# Altium PCB PCB1.PcbDoc
Units mm, origin at the board's own origin, x right, y up, seen from the top; angles counter-clockwise.
Board outline 62 x 50 mm, 2 copper layers (Top Layer, Bottom Layer), stack 1.571 mm thick; 44 components, 32 nets, 185 pads, 33 vias.
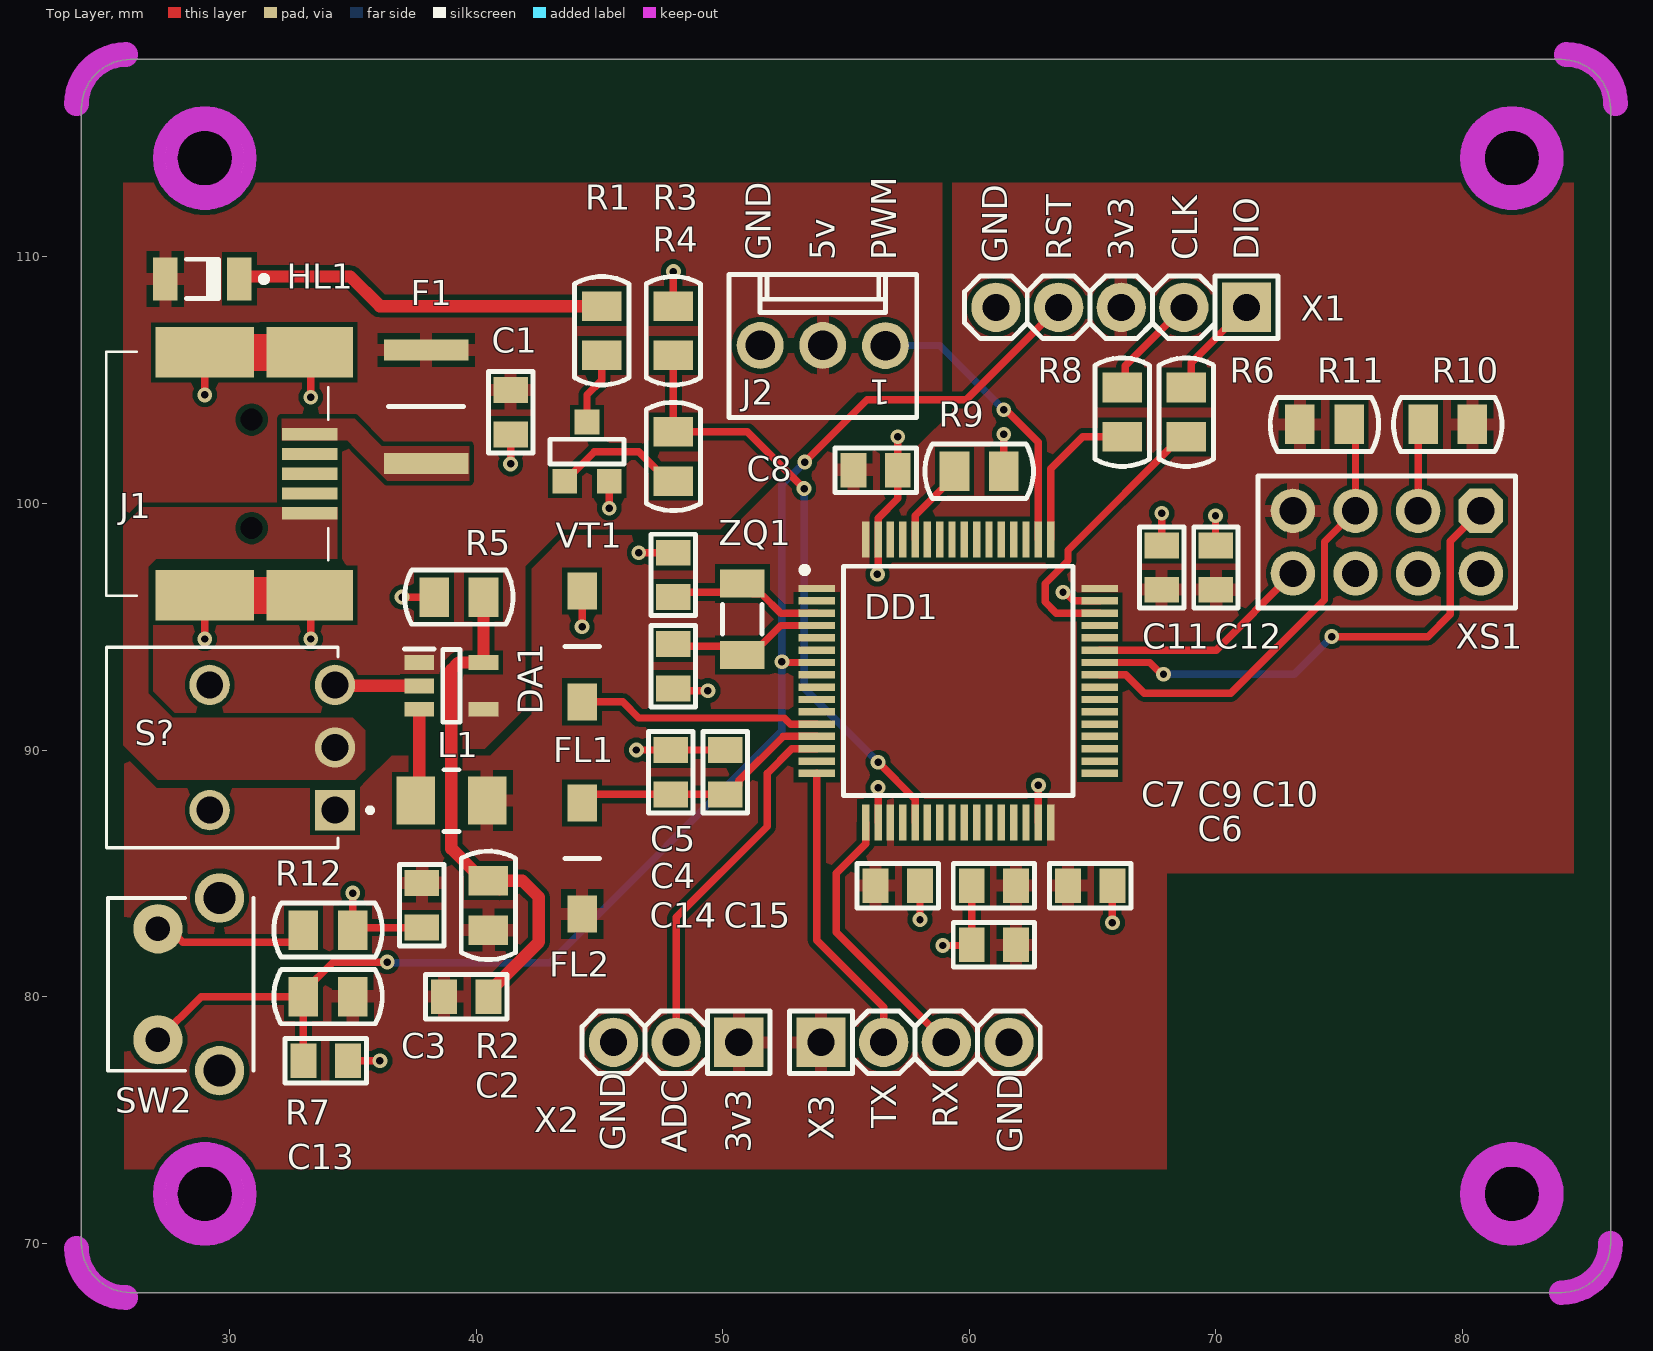
[diagram p0: Top Layer view]
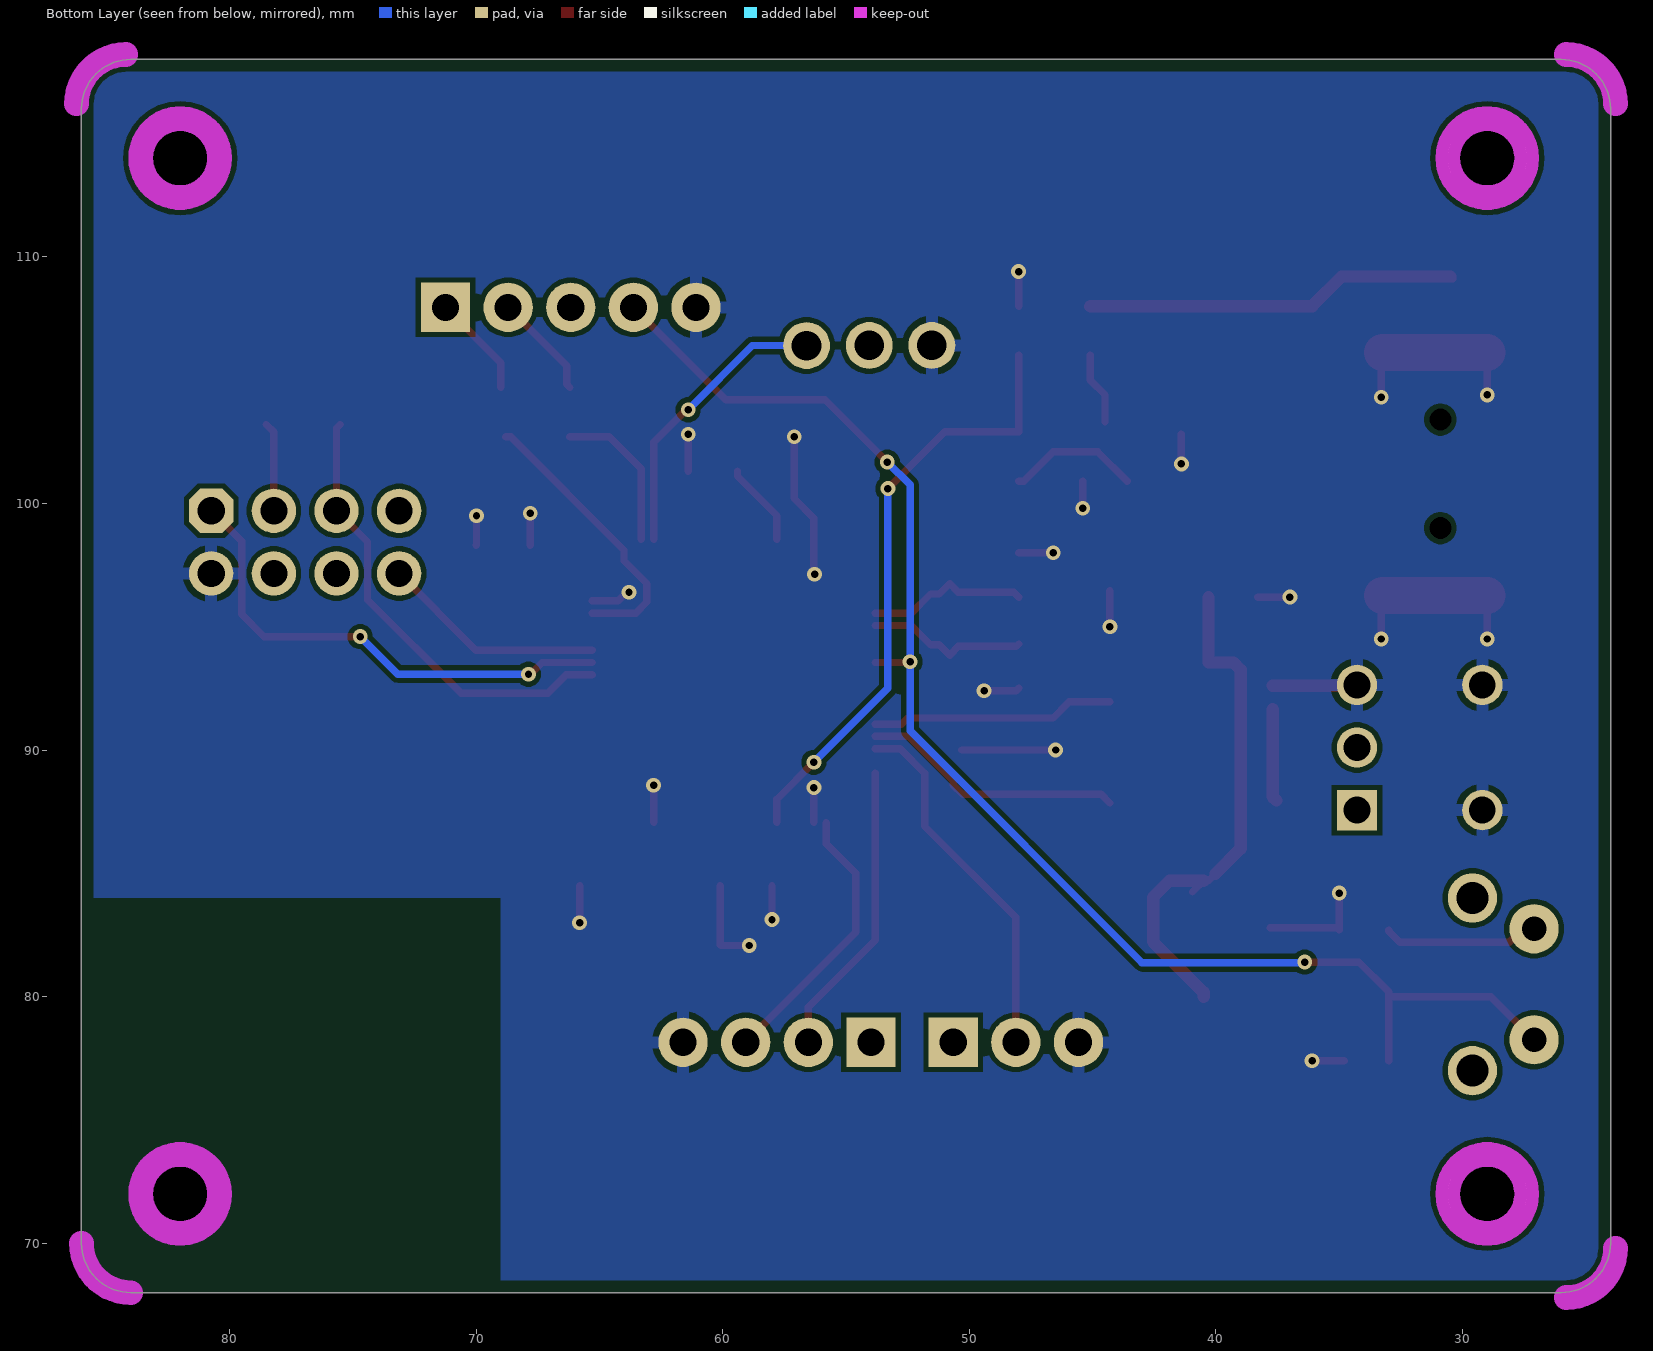
[diagram p1: Bottom Layer view, seen from below]
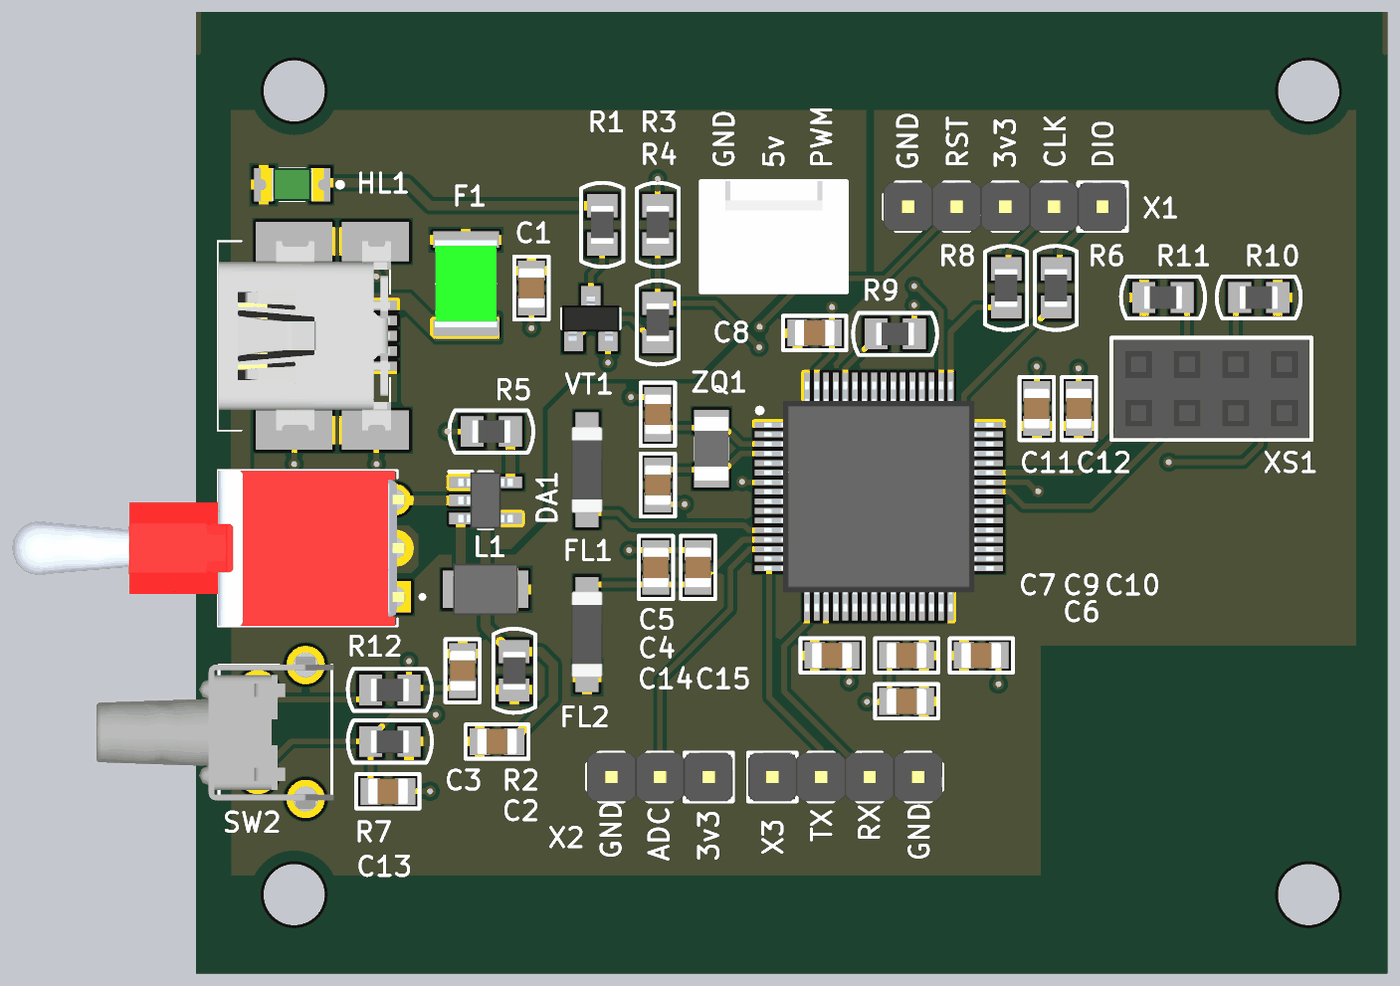
[diagram p2: 3D render of the assembled board from above, using the file's embedded part models]

## Layer stack, top to bottom
Top Solder: solder mask 0.0102, Solder Resist, Dk 3.5
Top Layer: signal copper 0.0356
Dielectric 1: dielectric 1.5, FR-4, Dk 4.8
Bottom Layer: signal copper 0.0356
Bottom Solder: solder mask 0.0102, Solder Resist, Dk 3.5

## Board outline
24,70 24,116 cw(c26,116) 26,118 84,118 cw(c84,116) 86,116 86,70 cw(c84,70) 84,68 26,68 cw(c26,70)

## Design rules (kind name [scope] priority, off if disabled: settings)
Clearance Clearance_1 [All] p1: gap=0.2 ignorepadtopadclearanceinfootprint=FALSE
Clearance [All] p2: gap=0.16 ignorepadtopadclearanceinfootprint=FALSE
PolygonConnect GND [InNet('GND')] p1: thpad.connectstyle=Relief thpad.reliefconductorwidth=0.508 thpad.reliefentries=4 thpad.polygonreliefangle="90 Angle" thpad.airgapwidth=0.254 smdpad.connectstyle=Relief smdpad.reliefconductorwidth=0.508 smdpad.reliefentries=4 smdpad.polygonreliefangle="90 Angle" smdpad.airgapwidth=0.254 via.connectstyle=Direct via.reliefconductorwidth=0.254 via.reliefentries=4 via.polygonreliefangle="90 Angle" via.airgapwidth=0.254
PolygonConnect 3v3MCU [HasFootprint('QFP50P1200X1200X160-64N')] p2: connectstyle=Direct reliefconductorwidth=0.254 reliefentries=4 polygonreliefangle="90 Angle" airgapwidth=0.254
PolygonConnect 5vDA1 [HasFootprint('SOT95P285X140-5N')] p3: connectstyle=Direct reliefconductorwidth=0.254 reliefentries=4 polygonreliefangle="90 Angle" airgapwidth=0.254
PolygonConnect SW [InNet('NetJ1_5') vs InNet('NetJ1_5')] p4: connectstyle=Direct reliefconductorwidth=0.254 reliefentries=4 polygonreliefangle="90 Angle" airgapwidth=0.254
PolygonConnect 3v3 [InNet('3v3') vs InNet('3v3')] p5: thpad.connectstyle=Relief thpad.reliefconductorwidth=0.508 thpad.reliefentries=4 thpad.polygonreliefangle="90 Angle" thpad.airgapwidth=0.254 smdpad.connectstyle=Relief smdpad.reliefconductorwidth=0.508 smdpad.reliefentries=4 smdpad.polygonreliefangle="90 Angle" smdpad.airgapwidth=0.254 via.connectstyle=Direct via.reliefconductorwidth=0.254 via.reliefentries=4 via.polygonreliefangle="90 Angle" via.airgapwidth=0.254
PolygonConnect 5v [InNet('5v') vs InNet('5v')] p6: thpad.connectstyle=Relief thpad.reliefconductorwidth=0.508 thpad.reliefentries=4 thpad.polygonreliefangle="90 Angle" thpad.airgapwidth=0.254 smdpad.connectstyle=Relief smdpad.reliefconductorwidth=0.508 smdpad.reliefentries=4 smdpad.polygonreliefangle="90 Angle" smdpad.airgapwidth=0.254 via.connectstyle=Direct via.reliefconductorwidth=0.254 via.reliefentries=4 via.polygonreliefangle="90 Angle" via.airgapwidth=0.254
PolygonConnect Fuse [InNet('NetF1_1') vs InNet('NetF1_1')] p7: connectstyle=Direct reliefconductorwidth=0.254 reliefentries=4 polygonreliefangle="90 Angle" airgapwidth=0.254
RoutingVias [All] p1: holewidth=0.3 width=0.6 viastyle="Through Hole" minholewidth=0.3 minwidth=0.6 maxholewidth=0.3 maxwidth=0.6
SolderMaskExpansion [All] p1: expansion=0.15 istentingtop=FALSE
Width [All] p1: maxlimit=3 minlimit=0.254 preferedwidth=0.3
30 further rules are at their usual default settings.

## Components (designator, comment, footprint, x,y, rotation, side; value= is the part's Value field where it differs from the comment)
C1 "4.7u" CAPC2012X135N 41.4,103.7 r90 top value=1n
C2 "22p" CAPC2012X135N 39.6,80 r180 top value=1n
C3 "10u" CAPC2012X135N 37.8,83.7 r90 top value=1n
C4 "1.5p" CAPC2012X135N 48,93.4 r90 top value=1n
C5 "1.5p" CAPC2012X135N 48,97.1 r270 top value=1n
C6 "10u" CAPC2012X135N 61,82.1 r0 top value=1n
C7 "10u" CAPC2012X135N 57.1,84.5 r180 top value=1n
C8 "10u" CAPC2012X135N 56.2,101.35 r180 top value=1n
C9 "10u" CAPC2012X135N 61,84.5 r0 top value=1n
C10 "10u" CAPC2012X135N 64.9,84.5 r180 top value=1n
C11 "10u" CAPC2012X135N 67.8,97.4 r270 top value=1n
C12 "10u" CAPC2012X135N 70,97.4 r270 top value=1n
C13 "10u" CAPC2012X135N 33.9,77.4 r180 top value=1n
C14 "100n" CAPC2012X135N 47.9,89.1 r270 top value=1n
C15 "1u" CAPC2012X135N 50.1,89.1 r270 top value=1n
DA1 "SY8088AAC" SOT95P285X140-5N 39,92.6 r0 top
DD1 "STM32F103RBT6" QFP50P1200X1200X160-64N 59.55,92.8 r0 top
F1 "MF-MSMF200-2" FUSC4632X85N 37.975,103.925 r90 top
FL1 "BLM41PG102SN1B" BLM41PG102SH1L 44.3,94.2 r90 top
FL2 "BLM41PG102SN1B" BLM41PG102SH1L 44.3,85.6 r90 top
HL1 "RED" LED_OSRAM_LGN971 28.9,109.1 r180 top
J1 "0675031020" 0675031020 33.25,101.2 r0 top
J2 "KK®" MOLEX_22-27-2031 54.06,106.405 r180 top
L1 "5.6nH" INDM3225X240N 39,87.95 r0 top
R1 "10к" R0805 45.1,107 r270 top value=22
R2 "680k" R0805 40.5,83.7 r90 top value=22
R3 "22" R0805 48,101.9 r270 top
R4 "10к" R0805 48,107 r90 top value=22
R5 "150k" R0805 39.3,96.2 r180 top value=22
R6 "10k" R0805 68.8,103.7 r90 top value=22
R7 "10k" R0805 34,80 r0 top value=22
R8 "10k" R0805 66.2,103.7 r90 top value=22
R9 "10k" R0805 60.4,101.3 r180 top value=22
R10 "10k" R0805 79.4,103.2 r0 top value=22
R11 "10k" R0805 74.4,103.2 r180 top value=22
R12 "5k" R0805 34,82.7 r180 top value=22
S? "2AS1T2A1M6RES" SW_2AS1T2A1M6RES 29.2,90.1 r270 top
SW2 "Push Button" TS-Axx-BTN 27.1,80.5 r270 top
VT1 "BJT-NPN" SOT-23 44.5,102.1 r0 top value=2Т3130А9
X1 "Connector, 5pin, 2.54mm, 500VAC, 3A" "CON: PLS-5" 66.16,107.95 r180 top
X2 "Connector, 3pin, 2.54mm, 500VAC, 3A" "CON: PLS-3" 48.113,78.148 r180 top
X3 "Connector, 4pin, 2.54mm, 500VAC, 3A" "CON: PLS-4" 57.797,78.148 r0 top
XS1 "Connector, 8pin, 2.54mm, 500VAC, 3A" "CON: PBD-8" 76.93,98.43 r180 top
ZQ1 "32768" RESC3216X65N 50.8,95.3 r270 top

## Footprints (in the part's own frame and the unit in brackets; to place one, negate y for a bottom-side part, rotate by r counter-clockwise, add the part's x,y. Pads: shape width x height; smd on the part's side, far side on the other; paste and mask are expansions set on the pad)
0675031020 [mm]
  rect 2.25x0.5 smd: 1(0,1.6) 2(0,0.8) 3(0,0) 4(0,-0.8) 5(0,-1.6)
  rect 3.5x2.05 smd: 6(0,4.925) 8(0,-4.925)
  rect 4x2.05 smd: 7(-4.25,4.925) 9(-4.25,-4.925)
  round 0 hole 0.9 unplated: 10(-2.35,2.2) 11(-2.35,-2.2)
  silkscreen extent -8.25,-4.95 0.75,4.95, body extent -8.19,-4.95 0.81,4.95, height 3.95
BLM41PG102SH1L [mm]
  rect 1.5x1.2 smd: 1(-2.25,0) 2(2.25,0)
  silkscreen extent 0,-0.7 0,0.7, body extent -2.25,-0.8 2.25,0.8, height 1.6
CAPC2012X135N [mm] "Chip Capacitor, Body 2.0x1.25mm, IPC Medium Density"
  rect 1.05x1.4 smd: 1(-0.9,0) 2(0.9,0)
  silkscreen extent -1.65,-0.9 1.65,0.9, body extent -1.05,-0.67 1.05,0.68, height 1.25
"CON: PBD-8" [mm] "PBD-8"
  oct 1.8x1.8 hole 1.1: 1(-3.81,-1.27)
  round 1.8 hole 1.1: 2(-3.81,1.27) 3(-1.27,-1.27) 4(-1.27,1.27) 5(1.27,-1.27) 6(1.27,1.27) 7(3.81,-1.27) 8(3.81,1.27)
  silkscreen extent -5.23,-2.68 5.23,2.68, body extent -5.08,-2.54 5.08,2.54, height 8.5
"CON: PLS-3" [mm]
  rect 2x2 hole 1.1: 1(-2.54,0)
  round 2 hole 1.1: 2(0,0) 3(2.54,0)
  silkscreen extent -3.81,-1.27 3.81,1.27, body extent -3.81,-1.27 3.81,1.27, height 8.54
"CON: PLS-4" [mm] "PLS-40 4 pin header"
  rect 2x2 hole 1.1: 1(-3.81,0)
  round 2 hole 1.1: 2(-1.27,0) 3(1.27,0) 4(3.81,0)
  silkscreen extent -5.08,-1.27 5.08,1.27, body extent -5.08,-1.27 5.08,1.27, height 8.54
"CON: PLS-5" [mm]
  rect 2x2 hole 1.1: 1(-5.08,0)
  round 2 hole 1.1: 2(-2.54,0) 3(0,0) 4(2.54,0) 5(5.08,0)
  silkscreen extent -6.35,-1.27 6.35,1.27, body extent -6.35,-1.27 6.35,1.27, height 8.54
FUSC4632X85N [mm]
  rect 0.85x3.43 smd: 1(-2.3,0) 2(2.3,0)
  silkscreen extent 0,-1.52 0,1.52, body extent -2.27,-1.62 2.27,1.62, height 0.85
INDM3225X240N [mm] "Inductor, Molded Body; 3.20mm L X 2.50mm W, IPC Medium Density"
  rect 1.55x1.95 smd: 1(-1.45,0) 2(1.45,0)
  silkscreen extent -0.3,-1.25 0.3,1.25, body extent -1.7,-1.35 1.7,1.35, height 2.4
LED_OSRAM_LGN971 [mm] "Green Chip LED, 2-Leads, Body 3.2 x1.6mm, IPC Medium Density"
  rect 1x1.75 smd: 1(-1.5,0) 2(1.5,0)
  silkscreen extent -2.63,-0.8 0.65,0.8, body extent -1.65,-0.85 1.65,0.85, height 1.2
MOLEX_22-27-2031 [mm] "2.54mm (.100\") Pitch KK® Header, Single Row, Vertical, 3 Circuits"
  round 1.9 hole 1.2: 1(-2.54,0.005) 2(0,0) 3(2.54,0)
  silkscreen extent -3.81,-2.87 3.81,2.93, body extent -3.81,-2.87 3.81,2.93, height 11.7
QFP50P1200X1200X160-64N [mm]
  rect 1.475x0.3 smd: 1(-5.738,3.75) 2(-5.738,3.25) 3(-5.738,2.75) 4(-5.738,2.25) 5(-5.738,1.75) 6(-5.738,1.25) 7(-5.738,0.75) 8(-5.738,0.25) 9(-5.738,-0.25) 10(-5.738,-0.75) 11(-5.738,-1.25) 12(-5.738,-1.75) 13(-5.738,-2.25) 14(-5.738,-2.75) 15(-5.738,-3.25) 16(-5.738,-3.75) 33(5.738,-3.75) 34(5.738,-3.25) 35(5.738,-2.75) 36(5.738,-2.25) 37(5.738,-1.75) 38(5.738,-1.25) 39(5.738,-0.75) 40(5.738,-0.25) 41(5.738,0.25) 42(5.738,0.75) 43(5.738,1.25) 44(5.738,1.75) 45(5.738,2.25) 46(5.738,2.75) 47(5.738,3.25) 48(5.738,3.75)
  rect 0.3x1.475 smd: 17(-3.75,-5.738) 18(-3.25,-5.738) 19(-2.75,-5.738) 20(-2.25,-5.738) 21(-1.75,-5.738) 22(-1.25,-5.738) 23(-0.75,-5.738) 24(-0.25,-5.738) 25(0.25,-5.738) 26(0.75,-5.738) 27(1.25,-5.738) 28(1.75,-5.738) 29(2.25,-5.738) 30(2.75,-5.738) 31(3.25,-5.738) 32(3.75,-5.738) 49(3.75,5.738) 50(3.25,5.738) 51(2.75,5.738) 52(2.25,5.738) 53(1.75,5.738) 54(1.25,5.738) 55(0.75,5.738) 56(0.25,5.738) 57(-0.25,5.738) 58(-0.75,5.738) 59(-1.25,5.738) 60(-1.75,5.738) 61(-2.25,5.738) 62(-2.75,5.738) 63(-3.25,5.738) 64(-3.75,5.738)
  silkscreen extent -6.35,-4.65 4.65,4.65, body extent -6,-6 6,6, height 1.6
R0805 [mm] "2012M"
  rect 1.2x1.6 smd: 1(-1,0) 2(1,0)
  silkscreen extent -2.2,-1.1 2.2,1.1, body extent -1,-0.6 1,0.6, height 0.5
RESC3216X65N [mm] "Chip Resistor, EIA 1206, Metric 3216, Body 3.2x1.6mm, IPC Medium Density"
  rect 1.15x1.8 smd: 1(-1.45,0) 2(1.45,0)
  silkscreen extent -0.6,-0.8 0.6,0.8, body extent -1.67,-0.87 1.68,0.88, height 0.65
SOT95P285X140-5N [mm]
  rect 1.2x0.6 smd: 1(-1.3,0.95) 2(-1.3,0) 3(-1.3,-0.95) 4(1.3,-0.95) 5(1.3,0.95)
  silkscreen extent -1.9,-1.48 0.35,1.5, body extent -1.43,-1.48 1.43,1.48, height 1.4
SOT-23 [mm] "КТ-46"
  rect 1x1 smd: 1(-0.9,-1.2) 2(0,1.2) 3(0.9,-1.2)
  silkscreen extent -1.5,-0.5 1.5,0.5, body extent -1.5,-1.15 1.5,1.15, height 1.11
SW_2AS1T2A1M6RES [mm]
  rect 1.635x1.635 / inner round 1.635 / far side rect 1.635x1.635 hole 1.09: 1(2.54,5.08)
  round 1.635 hole 1.09: 2(0,5.08) 3(-2.54,5.08) SH1(2.54,0) SH2(-2.54,0)
  silkscreen extent -4.07,-4.18 4.07,6.6, body extent -4.07,-14.93 4.07,5.58, height 6.32
TS-Axx-BTN [mm]
  round 2 hole 1.3: 0(-3.5,2.5) 0(3.5,2.5)
  round 2 hole 1: 1(-2.25,0) 2(2.25,0)
  silkscreen extent -3.5,-2.02 3.5,3.88, body extent -3.95,-8.43 4,3.97, height 7.3

## Part data
C1 C2 C3 C4 C5 C6 C7 C8 C9 C10 C11 C12 C13 C14 C15: library part CC0805_1NF_50V_5%_NP0, "Non-polarised capacitor", Case=0805, Manufacturer=GENERIC, Manufacturer1 ComponentHeight=0.88mm, Manufacturer1 Example=KEMET, Manufacturer1 Part Number=C0805C102J5GACTU, Tolerance=±5%, Voltage=50V, Author="CERN DEM JLC", Component Type=Standard, CreateDate=02.02.2011, HelpURL=\\cern.ch\dfs\Applications\Altium\Datasheets\CC0805_NP0_KEMET.pdf, LatestRevisionDate=02.02.2011, Manufacturer Part Number=CC0805_1NF_50V_5%_NP0, Mounted=Yes, Part Description="SMD Multilayer Chip Ceramic Capacitor", Part Number=CC0805_1NF_50V_5%_NP0, Pin Count=2, SMD=Yes, Socket=No, Status=None, TC=NP0
DA1: "Power Supply", Manufacturer_Name="Silergy Corp", Datasheet Link=https://datasheet.lcsc.com/szlcsc/Silergy-Corp-SY8088AAC_C79313.pdf, Height=1.4mm, Manufacturer_Part_Number=SY8088AAC
DD1: "Integrated Circuit", Manufacturer_Name=STMicroelectronics, Mouser Part Number=511-STM32F103RBT6, Arrow Part Number=STM32F103RBT6, Arrow Price/Stock=https://www.arrow.com/en/products/stm32f103rbt6/stmicroelectronics?region=europe, Datasheet Link=http://www.st.com/st-web-ui/static/active/en/resource/technical/document/datasheet/CD00161566.pdf, Height=1.6mm, Manufacturer_Part_Number=STM32F103RBT6, Mouser Price/Stock=https://www.mouser.co.uk/ProductDetail/STMicroelectronics/STM32F103RBT6?qs=bhCVus9SdFv12dJRZaBmJg%3D%3D
F1: "Fuse", Manufacturer_Name=Bourns, Mouser Part Number=652-MF-MSMF200-2, Arrow Part Number=MF-MSMF200-2, Arrow Price/Stock=https://www.arrow.com/en/products/mf-msmf200-2/bourns?region=nac, Datasheet Link=http://uk.rs-online.com/web/p/products/6478263, Height=0.85mm, Manufacturer_Part_Number=MF-MSMF200-2, Mouser Price/Stock=https://www.mouser.co.uk/ProductDetail/Bourns/MF-MSMF200-2?qs=UBppDQZA%252BGTG9DpaUCFm8g%3D%3D
FL1 FL2: "Filter", Manufacturer_Name="Murata Electronics", Mouser Part Number=81-BLM41PG102SN1B, Arrow Part Number=BLM41PG102SN1B, Arrow Price/Stock=https://www.arrow.com/en/products/blm41pg102sn1b/murata-manufacturing, Datasheet Link=https://www.murata.com/en-us/products/productdetail?partno=BLM41PG102SN1%23, Height=1.8mm, Manufacturer_Part_Number=BLM41PG102SN1B, Mouser Price/Stock=https://www.mouser.co.uk/ProductDetail/Murata-Electronics/BLM41PG102SN1B?qs=%2F%252BYoplLUB5gO4z9jcqAVCQ%3D%3D
HL1: library part LED_OSRAM_LGN971, "LED 1C 2A", Case=1206, Color=Green, Manufacturer=OSRAM, Manufacturer Part Number=LGN971, Author="CERN DEM JLC", Component Type=Standard, ComponentHeight=1.2mm, CreateDate=15.09.2009, HelpURL=\\cern.ch\dfs\Applications\Altium\Datasheets\LED_OSRAM_LGN971.pdf, LatestRevisionDate=17.03.2010, Mounted=Yes, PackageDescription="Green Chip LED, 2-Leads, Body 3.2 x1.6mm, IPC Medium Density", Part Description="Surface Mount Green LED (1206 Case)", Part Number=LED_OSRAM_LGN971, Pin Count=2, SMD=Yes, Socket=No
J1: "Connector", Manufacturer_Name=Molex, Mouser Part Number=N/A, Arrow Part Number=0675031020, Arrow Price/Stock=https://www.arrow.com/en/products/0675031020/molex?region=europe, Datasheet Link=http://www.molex.com/webdocs/datasheets/pdf/en-us/0675031020_IO_CONNECTORS.pdf, Manufacturer_Part_Number=0675031020, Mouser Price/Stock=https://www.mouser.co.uk/ProductDetail/Molex/0675031020?qs=PBcRNPEHKsqIYt%2F7ECA4dQ%3D%3D
J2: library part MOLEX_22-27-2031, "Connector 3 Male", Manufacturer=MOLEX, Manufacturer Part Number=22-27-2031, Author="CERN DEM JLC", Component Type=Standard, ComponentHeight=11.7mm, CreateDate=04.12.2008, Family=KK®, HelpURL=\\cern.ch\dfs\Applications\Altium\Datasheets\MOLEX_22-27-2031.pdf, LatestRevisionDate=04.12.2008, Mounted=Yes, Part Description="2.54mm (.100\") Pitch KK® Wire-to-Board Header, Vertical, with Friction Lock, 3 Circuits, Tin (Sn) Plating", Part Number=MOLEX_22-27-2031, Pin Count=3, SMD=No, Socket=No, Status=None
L1: library part IND1210_5.6NH_5%_TDK_NLV32T, "Inductor", Case=1210, Manufacturer=TDK, Manufacturer Part Number=NLV32T-056J-PF, Power=450mA, Resistance=0.33R, Tolerance=±5%, Author="CERN DEM JLC", Component Type=Standard, ComponentHeight=2.4mm, CreateDate=20.04.2010, HelpURL=\\cern.ch\dfs\Applications\Altium\Datasheets\IND1210_TDK_NLV32T.pdf, LatestRevisionDate=20.04.2010, Mounted=Yes, Part Description="SMT Inductors (Coil) For Signal Line(Wound)", Part Number=IND1210_5.6NH_5%_TDK_NLV32T, Pin Count=2, SMD=Yes, Socket=No, Status=None
R1 R2 R3 R4 R5 R6 R7 R8 R9 R10 R11 R12: library part "Р1-12-0,125-22 Ом±5%-М", Limit Voltage=150V, Manufacturer="ОАО \"Ресурс\"", Temperature Coefficient=250ppm, Tolerance=±5%, Total Power Dissipation=0,125W, Working Temperature Max=+85°С, Working Temperature Min=-60°С, Application Category=5, ID=11, Part Number="Р1-12-0,125-22 Ом±5%-М", Published=24.03.2010, Publisher="Andrew Danich", Specification="ШКАБ.434110.002 ТУ", Type=Резистор
S?: "Toggle Switches Sealed Sub-Miniature SPDT switch on-on right angle pc thru-hole", Package=None, Availability="In Stock", Check_prices=https://www.snapeda.com/parts/2AS1T2A1M6RES/Dailywell/view-part/?ref=eda, MF=Dailywell, MP=2AS1T2A1M6RES, Price=None, SnapEDA_Link=https://www.snapeda.com/parts/2AS1T2A1M6RES/Dailywell/view-part/?ref=snap
SW2: library part PB_TYCO_ALCOSWITCH_FSMSM, "Push-Button Switch SPDT", Manufacturer="TYCO ALCOSWITCH", Manufacturer Part Number="FSMSM or 1437566-3", Author="CERN DEM JLC", Component Type=Standard, ComponentHeight=4.3mm, CreateDate=30.06.2008, Family="Push Button", HelpURL=\\cern.ch\dfs\Applications\Altium\Datasheets\PB_TYCO_ALCOSWITCH_FSMSM.pdf, LatestRevisionDate=08.09.2008, Mounted=Yes, PackageDescription="Body 3.5x6.0mm, Pushbutton Switch,  TYCO ALCOSWITCH FSMSM Serie", Part Description="12VDC 50mA SPST Tactile  Push-Button Switch", Part Number=PB_TYCO_ALCOSWITCH_FSMSM, Pin Count=2, SMD=Yes, Socket=No, Status=None
VT1: library part 2Т3130А9, C-E Voltage=40V, Collector Current=100mA, DC Current Gain=80, Manufacturer="ООО \"НПК \"ДАЛЕКС\"", Working Temperature Max=+85°С, Working Temperature Min=-60°С, Application Category=5, Functional Analog="BC847A, BC846A", ID=1, Part Number=2Т3130А9, Published=07.05.2013, Publisher="Andrew Danich", Specification="аАО.339.569 ТУ", Type=Транзистор
X1: library part PLS-5, CurrentMax=3A, Manufacturer=Connfly, VoltageMax=500VAC, CommentText="\"Разъем\"", HelpURL=https://www.chipdip.ru/product/pls-5, Multichannel=5pin, PartNumber=PLS-5, Pitch=2.54mm, TypeConnector=Connector, ValueManufacturerPartNumber="Connector, 5pin, 2.54mm, 500VAC, 3A"
X2: library part PLS-3, CurrentMax=3A, Manufacturer=Connfly, VoltageMax=500VAC, CommentText="\"Разъем\"", HelpURL=https://www.chipdip.ru/product/pls-3, Multichannel=3pin, PartNumber=PLS-3, Pitch=2.54mm, TypeConnector=Connector, ValueManufacturerPartNumber="Connector, 3pin, 2.54mm, 500VAC, 3A"
X3: library part PLS-4, CurrentMax=3A, Manufacturer=Connfly, VoltageMax=500VAC, CommentText="\"Разъем\"", HelpURL=https://www.chipdip.ru/product/pls-4, Multichannel=4pin, PartNumber=PLS-4, Pitch=2.54mm, TypeConnector=Connector, ValueManufacturerPartNumber="Connector, 4pin, 2.54mm, 500VAC, 3A"
XS1: library part PBD-8, CurrentMax=3A, Manufacturer=Connfly, VoltageMax=500VAC, CommentText="\"Разъем\"", HelpURL=https://www.chipdip.ru/product/pbd-8, Multichannel=8pin, PartNumber=PBD-8, Pitch=2.54mm, TypeConnector=Connector, ValueManufacturerPartNumber="Connector, 8pin, 2.54mm, 500VAC, 3A"
ZQ1: library part XTAL, "Crystal Oscillator", LatestRevisionDate=17-Jul-2002, LatestRevisionNote="Re-released for DXP Platform.", PackageDescription="Crystal, Thru-Hole; 2 Leads; Body 3.1 x 8.2 mm (Dia.xH)", PackageReference=R38, Published=8-Jun-2000, Publisher="Altium Limited"

## Free pads (board coordinates)
  round 3.2 hole 3.2 unplated: ""(29,72) ""(29,114) ""(82,72) ""(82,114)

## Via types
v1: diameter 0.6, hole 0.3, Top Layer to Bottom Layer, tented both sides, 33 vias

## Nets (pads, with @x,y where several pads share a name; then routed paths per layer and width w, separated by ;. In a path a pad name is that pad's centre, name@x,y a point inside that pad or via, vN(x,y) a via of type N, cw(c..) or ccw(c..) an arc to the next point about the centre after c; other vN are vias at no path point)
3v3: C2.2 C3.2 C6.2 C7.2 C8.2 C9.2 C10.2 C11.2 C12.2 DD1.1 DD1.19 DD1.32 DD1.48 DD1.64 FL2.1 L1.2 R2.1 R7.2 R10.2 R11.2 X1.3 X2.1 X3.1 XS1.7
5v: C1.2 DA1.1 DA1.4 F1.2 HL1.2 J2.2
GND: C1.1 C3.1 C4.1 C5.1 C6.1 C7.1 C8.1 C9.1 C10.1 C11.1 C12.1 C13.1 C14.1 C15.1 DA1.2 DD1.18 DD1.31 DD1.47 DD1.63 FL1.2 J1.6 J1.7 J1.8 J1.9 J2.3 R4.2 R5.2 R9.1 R12.1 S?.3 S?.SH1 S?.SH2 VT1.3 X1.5 X2.3 X3.4 XS1.2 | length 58.7
  Top Layer w0.3: v1(29,94.5) J1.9 ; v1(29,104.4) J1.7 ; J1.8 33.3,96.225 v1(33.3,94.5) ; J1.6 33.3,106.075 v1(33.3,104.3) ; S?.3 S?.3@34.32,92.6 ; C13.1 v1(36.1,77.4) ; v1(35,84.2) R12.1 35.1,82.8 C3.1 ; v1(37,96.2) R5.2 ; v1(41.4,101.6) C1.1 ; v1(44.3,95) FL1.2 ; v1(45.4,99.8) VT1.3 ; v1(46.5,90) C14.1 ; v1(46.6,98) C5.1 ; C14.1@48,90 C15.1@50.3,90 ; C4.1 48.1,92.4 v1(49.4,92.4) ; R4.2 v1(48,109.4) ; v1(56.275,97.125) 56.3,97.15 DD1.63 56.3,99.4 57.1,100.2 C8.1 v1(57.1,102.7) ; DD1.18 v1(56.3,88.475) ; v1(58,83.125) C7.1 ; v1(58.925,82.075) 60.075,82.075 C6.1 C9.1 ; R9.1 v1(61.4,102.8) ; DD1.31 v1(62.8,88.575) ; v1(63.8,96.4) 63.881,96.4 64.231,96.05 DD1.47 ; v1(65.8,83) C10.1 ; C11.1 v1(67.8,99.6) ; v1(69.983,99.501) 69.983,98.317 C12.1
  Top Layer w0.5: S?.3@34.32,92.6 DA1.2
  Top Layer w1.5: J1.9 J1.8 ; J1.7 J1.6
NetC2_1: C2.1 DA1.5 R2.2 R5.1 | length 21.2
  Top Layer w0.3: R2.2@40.017,84.983 40.3,84.7 R2.2 R2.2@40.95,84.25
  Top Layer w0.5: R2.2@40.017,84.983 39,86 39,93.257 39.293,93.55 DA1.5 R5.1 ; C2.1 40.5,80.175 42.546,82.221 42.546,84.032 41.878,84.7 R2.2
NetC4_2: C4.2 DD1.4 ZQ1.2 | length 6.5
  Top Layer w0.3: C4.2 48.1,94.2 50.45,94.2 ZQ1.2 51.225,94.275 51.575,94.275 52.35,95.05 DD1.4
NetC5_2: C5.2 DD1.3 ZQ1.1 | length 6.5
  Top Layer w0.3: C5.2 48.2,96.4 50.45,96.4 ZQ1.1 51.225,96.325 51.575,96.325 52.35,95.55 DD1.3
NetC13_2: C13.2 DD1.7 R7.1 SW2.2 X1.4 | length 58.8
  Top Layer w0.3: SW2.2 28.85,80 R7.1 ; C13.2 R7.1 ; v1(36.4,81.4) 34.2,81.4 33,80.2 R7.1 ; v1(52.4,93.575) 52.425,93.55 DD1.7 ; v1@53.33,101.68 55.85,104.2 59.87,104.2 X1.4
  Bottom Layer w0.3: v1(36.4,81.4) 36.425,81.375 43,81.375 52.4,90.775 v1(52.4,93.575) 52.4,100.75 v1(53.325,101.675)
NetDA1_3: DA1.3 L1.1 | length 3.8
  Top Layer w0.5: L1.1 37.7,88.1 DA1.3
NetDD1_14: DD1.14 X2.2 | length 15.6
  Top Layer w0.3: X2.2@48.113,77.414 48.113,83.213 51.8,86.9 51.8,89.05 52.8,90.05 DD1.14
NetDD1_16: DD1.16 X3.2 | length 12
  Top Layer w0.3: DD1.16 53.812,82.288 56.527,79.573 X3.2
NetDD1_17: DD1.17 X3.3 | length 11.3
  Top Layer w0.3: DD1.17 55.8,86.2 54.6,85 54.6,82.615 X3.3
NetDD1_21: DD1.21 R3.1 R4.1 | length 24.8
  Top Layer w0.3: R4.1 R3.1 51,102.9 v1(53.3,100.6) ; v1(56.3,89.5) 57.8,88 DD1.21
  Bottom Layer w0.3: v1(53.3,100.6) 53.3,92.5 v1(56.3,89.5)
NetDD1_41: DD1.41 R11.1 XS1.5 | length 18.7
  Top Layer w0.3: DD1.41 66.35,93.05 67.1,92.3 70.6,92.3 74.4,96.1 74.4,98.44 XS1.5 75.66,103.04 R11.1@75.5,103.2
NetDD1_42: DD1.42 XS1.1 | length 20.1
  Top Layer w0.3: DD1.42 67.319,93.55 67.794,93.075 v1(67.875,93.075) ; v1(74.7,94.6) 78.6,94.6 79.5,95.5 79.5,98.46 XS1.1
  Bottom Layer w0.3: v1@67.887,93.075 73.175,93.075 v1(74.7,94.6)
NetDD1_43: DD1.43 XS1.8 | length 9.1
  Top Layer w0.3: DD1.43 70.01,94.05 XS1.8
NetDD1_46: DD1.46 R6.1 | length 11.6
  Top Layer w0.3: DD1.46 63.525,95.55 63.075,96 63.075,96.75 64,97.675 64,98.1 68.6,102.7 R6.1
NetDD1_49: DD1.49 R8.1 | length 6.3
  Top Layer w0.3: DD1.49 63.3,101.4 64.6,102.7 R8.1
NetDD1_50: DD1.50 J2.1 | length 11.8
  Top Layer w0.3: v1(61.4,103.8) 61.481,103.8 62.8,102.481 62.8,100.104 DD1.50
  Bottom Layer w0.3: J2.1 58.8,106.4 v1(61.4,103.8)
NetDD1_60: DD1.60 R9.2 | length 3.4
  Top Layer w0.3: DD1.60 57.8,99.5 59.4,101.1 R9.2
NetF1_1: F1.1 J1.1
NetHL1_1: HL1.1 R1.1 | length 15.2
  Top Layer w0.3: HL1.1 HL1.1@30.5,109.2
  Top Layer w0.5: HL1.1@30.5,109.2 34.9,109.2 36.1,108 R1.1
NetJ1_5: J1.5 S?.2
NetR1_2: R1.2 VT1.2 | length 2.9
  Top Layer w0.3: VT1.2 44.5,104.4 45.1,105 R1.2
NetR3_2: R3.2 VT1.1 | length 5.4
  Top Layer w0.3: VT1.1 44.8,102.1 46.6,102.1 47.8,100.9 R3.2
NetR6_2: R6.2 X1.1 | length 4.2
  Top Layer w0.3: R6.2@69,104.7 69,105.71 X1.1
NetR8_2: R8.2 X1.2 | length 4.3
  Top Layer w0.3: R8.2 66.324,104.824 66.324,105.574 X1.2
NetR10_1: R10.1 XS1.3 | length 3.6
  Top Layer w0.3: XS1.3 78.2,102.9 R10.1@78.5,103.2
NetR12_2: R12.2 SW2.1 | length 6.4
  Top Layer w0.3: SW2.1 27.56,82.75 28.11,82.2 32.55,82.2 33,82.65 R12.2
NetXS1_4: XS1.4
NetXS1_6: XS1.6
VDDA: C14.2 C15.2 DD1.13 FL2.2 | length 10.7
  Top Layer w0.3: FL2.2 44.65,88.2 48,88.2 50.275,88.2 50.65,88.575 50.65,88.75 52.45,90.55 DD1.13
VSSA: DD1.12 FL1.1 | length 9.9
  Top Layer w0.3: FL1.1 45.95,91.95 46.6,91.3 52.5,91.3 52.75,91.05 DD1.12
pads on no net: DD1.2 DD1.5 DD1.6 DD1.8 DD1.9 DD1.10 DD1.11 DD1.15 DD1.20 DD1.22 DD1.23 DD1.24 DD1.25 DD1.26 DD1.27 DD1.28 DD1.29 DD1.30 DD1.33 DD1.34 DD1.35 DD1.36 DD1.37 DD1.38 DD1.39 DD1.40 DD1.44 DD1.45 DD1.51 DD1.52 DD1.53 DD1.54 DD1.55 DD1.56 DD1.57 DD1.58 DD1.59 DD1.61 DD1.62 J1.2 J1.3 J1.4 J1.10 J1.11 S?.1 SW2.0

## Polygon pours and split planes (outlines as drawn)
5v on Top Layer "NONET_L-01_P-001" (solid, remove dead copper, pour order 8): 25.7,113 25.7,92.45 28.1,90.05 40.35,90.05 42,91.7 42,97.45 43.5,98.95 49.9,98.95 55.45,104.5 58.9,104.5 58.9,113
NetJ1_5 on Top Layer "NONET_L-01_P-001" (solid, pour order 5): 34.375,99.85 34.375,97.75 27.025,97.75 26.7,97.425 26.7,92.3 27.7,91.3 35.007,91.3 35.5,90.807 35.5,89.2 35.1,88.8 27.1,88.8 25.7,90.2 25.7,99.094 26.456,99.85
3v3 on Top Layer "NONET_L-01_P-001" (solid, remove dead copper, pour order 9): 59.3,113 59.3,103.725 57.95,102.375 53.775,102.375 50.1,98.7 43.6,98.7 42.575,97.675 42.25,97.35 42.25,91.45 40.575,89.775 36.575,89.775 35.525,88.725 35.25,88.45 27.05,88.45 25.725,89.775 25.725,73 84.5,73 84.5,113
NetF1_1 on Top Layer "NONET_L-01_P-001" (solid, pour order 2): 32.125,102.55 32.125,103.425 35.075,103.425 36.175,102.325 38.725,102.325 39.725,102.325 39.725,100.925 36.4,100.925 35.125,102.2 34.775,102.55 34.45,102.55 34.35,102.55
GND on Bottom Layer "NONET_L-01_P-001" (solid, remove dead copper, pour order 3): 24.5,117.5 85.5,117.5 85.5,68.5 24.5,68.5

## Keep-outs
Keep-Out Layer:
  circle w1: c82,72 r1.6
  circle w1: c29,114 r1.6
  circle w1: c82,114 r1.6
  circle w1: c29,72 r1.6
  lines w1: 23.8,69.8 ccw(c25.8,69.8) 25.8,67.8 ; 23.8,116.2 cw(c25.8,116.2) 25.8,118.2 ; 84,68 ccw(c84,70) 86,70 ; 84.2,118.2 cw(c84.2,116.2) 86.2,116.2

## Other copper
Top Layer:
  pour cut-out: 84.75,73 84.75,85 68,85 68,73
Bottom Layer:
  pour cut-out: 86,68 86,84 69,84 69,68

## Silkscreen, mask and mechanical layers (free items; w line width, h text height)
Top Overlay:
  text "GND" at 51.94,109.86 h1 r90
  text "5v" at 54.54,109.86 h1 r90
  text "PWM" at 57.04,109.86 h1 r90
  text "RST" at 64.14,109.86 h1 r90
  text "3v3" at 66.64,109.86 h1 r90
  text "CLK" at 69.24,109.86 h1 r90
  text "DIO" at 71.74,109.86 h1 r90
  text "GND" at 61.54,109.76 h1 r90
  text "TX" at 57.04,74.66 h1 r90
  text "RX" at 59.54,74.66 h1 r90
  text "GND" at 46.04,73.76 h1 r90
  text "ADC" at 48.54,73.66 h1 r90
  text "3v3" at 51.14,73.66 h1 r90
  text "GND" at 62.14,73.66 h1 r90
Board:
  lines w0.25: 24,70 24,116 24,70 ; 26,68 84,68 26,68 ; 26,118 84,118 26,118 ; 86,70 86,116 86,70
  lines w0.254: 24,70 ccw(c26,70) 26,68 cw(c26,70) 24,70 ; 24,116 cw(c26,116) 26,118 ccw(c26,116) 24,116 ; 84,68 ccw(c84,70) 86,70 cw(c84,70) 84,68 ; 84,118 cw(c84,116) 86,116 ccw(c84,116) 84,118

## Dimensions
24,116 to 86,116 on Top Layer

## Text inside footprints (layer, text, board x,y; h text height)
J2: Top Overlay "1" at 56.81,105.005 h1 r180; Mechanical 14 "1" at 56.81,105.005 h1 r180
S?: Mechanical 13 "PCB EDGE" at 25.39,85.655 h1.27 r270